# Altium PCB AIRZAI_NFC_READER_FLEX.PcbDoc (part 1 of 2)
Units mil, origin at the board's own origin, x right, y up, seen from the top; angles counter-clockwise.
Board outline 2897.24 x 5925.59 mil, 2 copper layers (Top Layer, Bottom Layer); 45 components, 43 nets, 193 pads, 92 vias.
Unrouted connection lines stored in the file: 129.
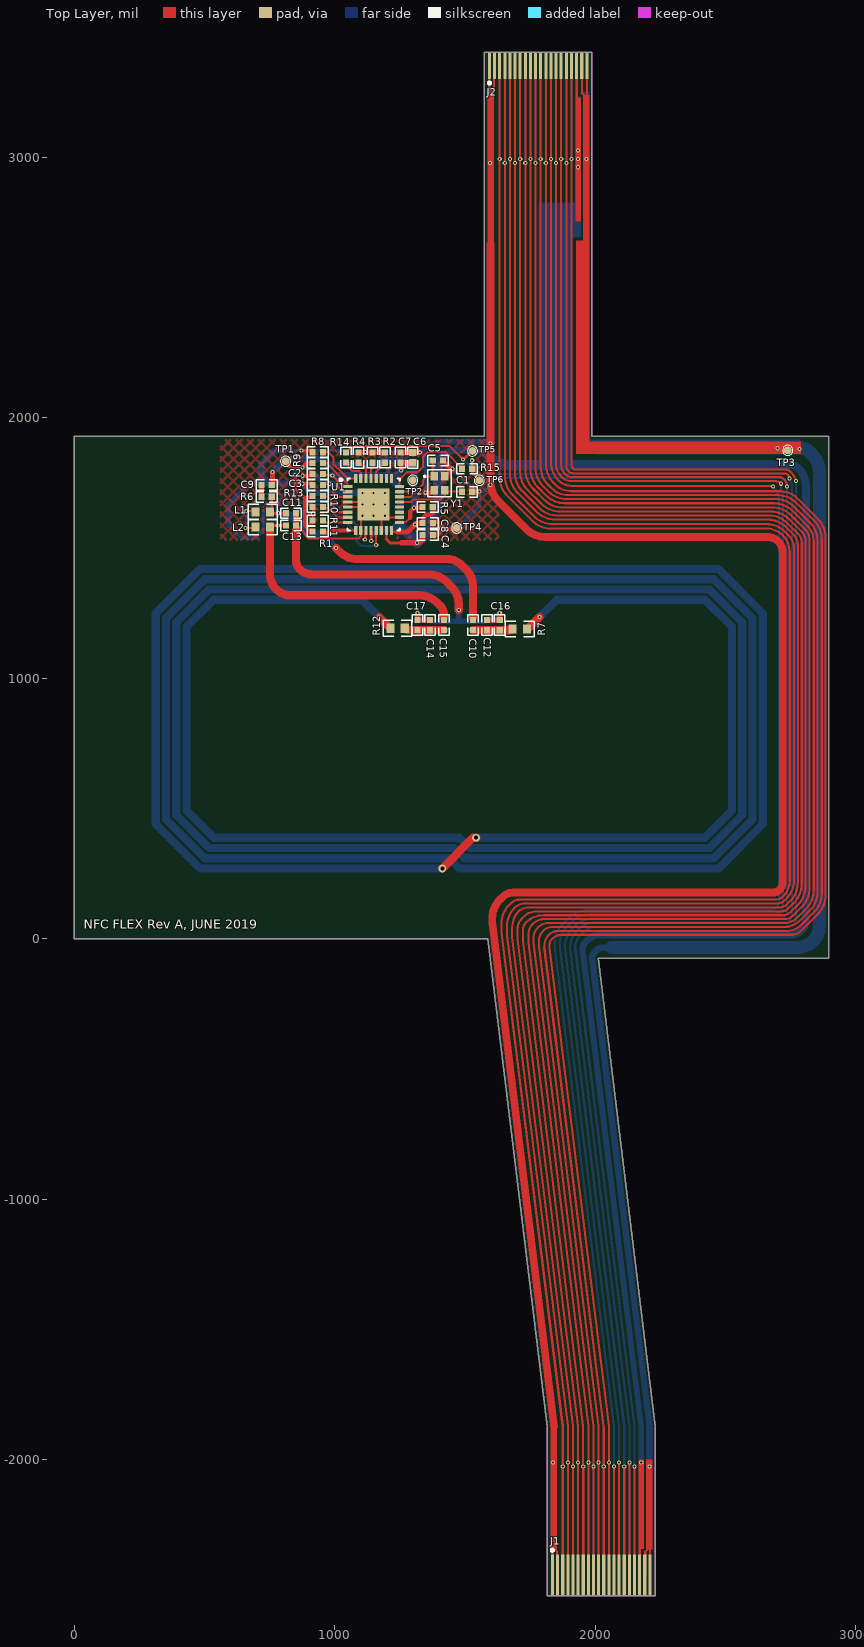
[diagram p0: Top Layer view]
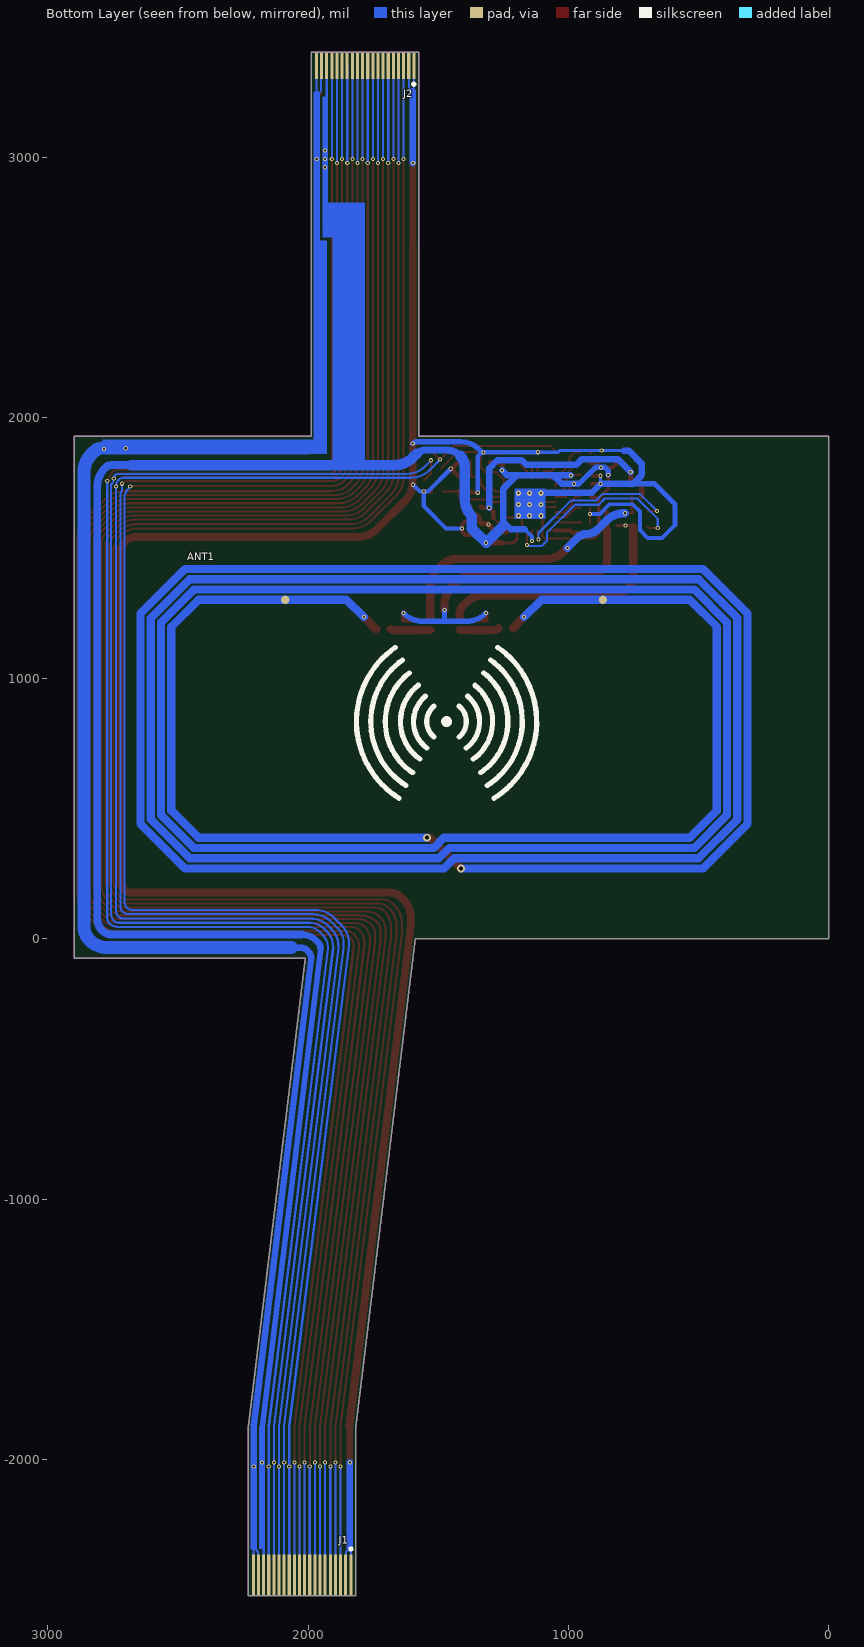
[diagram p1: Bottom Layer view, seen from below]
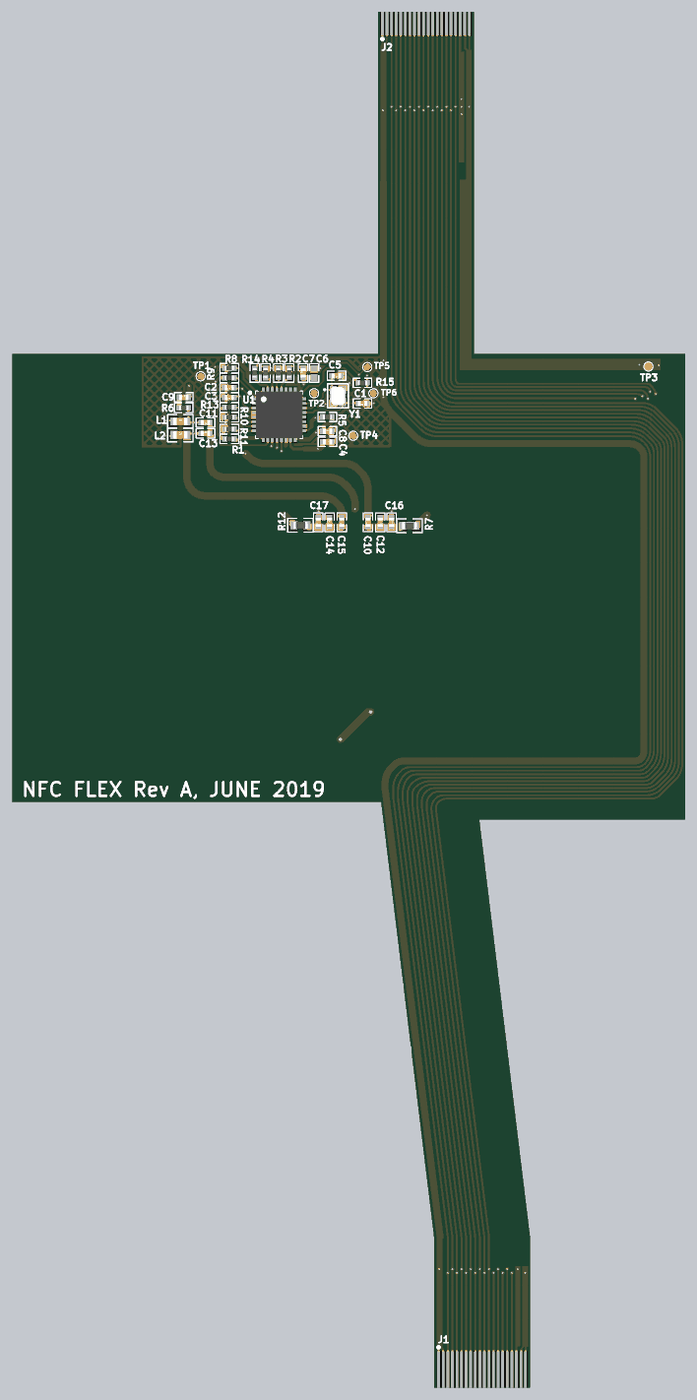
[diagram p3: 3D render of the assembled board from above, using the file's embedded part models]

## Layer stack, top to bottom
Top Solder: solder mask 0.4, Solder Resist, Dk 3.5
Top Layer: signal copper 1.4
Dielectric 1: dielectric 12.6, FR-4, Dk 4.8
Bottom Layer: signal copper 1.4
Bottom Solder: solder mask 0.4, Solder Resist, Dk 3.5

## Board outline
0.02,0 0.02,1929.12 1574.03,1929.12 1574.03,3402.74 1987.42,3402.74 1987.42,1929.12 2897.26,1929.12 2897.26,-75.35 2010.72,-75.35 2010.72,-75.36 2229.54,-1875.34 2229.54,-2522.85 1816.16,-2522.85 1816.16,-1875.34 1588.18,0 1588.16,0

## Design rules (kind name [scope] priority, off if disabled: settings)
Clearance Clearance_polygon_5V [OnLayer('Keep-Out Layer') vs (InNet('+5V') AND InPolygon)] p1: gap=10 ignorepadtopadclearanceinfootprint=FALSE
Clearance Clearance_POLYGON_KEEPOUT [(OnLayer('Keep-Out Layer')) vs (InNet('GND') AND InPolygon)] p2: gap=10 ignorepadtopadclearanceinfootprint=FALSE
Clearance [All] p3: gap=6 ignorepadtopadclearanceinfootprint=FALSE
MinimumSolderMaskSliver [All] p1: minsoldermaskwidth=1
PolygonConnect [All] p1: connectstyle=Direct reliefconductorwidth=10 reliefentries=4 polygonreliefangle="90 Angle" airgapwidth=10
RoomDefinition AIRZAI_NFC_READER_FLEX [InComponentClass('AIRZAI_NFC_READER_FLEX')] p1: confinementstyle=ConfineIn formatcopy=TRUE lockcomponents=FALSE outline -15221.72,-15299.04 15708.16,-15299.04 15708.16,7258.15 -15221.72,7258.15
RoutingVias [All] p1: holewidth=28 width=50 viastyle="Through Hole" minholewidth=8 minwidth=16 maxholewidth=28 maxwidth=50
SilkToSilkClearance [All] p1: silktosilkclearance=0
SilkToSolderMaskClearance [IsPad] p1: minsilkscreentomaskgap=2 clearancetoexposedcopper=TRUE
SolderMaskExpansion [All] p1: expansion=4
UnRoutedNet [All] p1: checkbadconnections=TRUE
Width [All] p1: maxlimit=100 minlimit=6 preferedwidth=10
26 further rules are at their usual default settings.

## Components (designator, comment, footprint, x,y, rotation, side; value= is the part's Value field where it differs from the comment)
ANT1 "NFC_ANT" ANTENNA-NFC-60MMX30MM 1477.74,844.1 r180 bottom locked
C1 "12pF" 0402CAP 1507.84,1715.47 r180 top
C2 "0.1µF" 0402CAP 934.39,1783.61 r180 top
C3 "0.1µF" 0402CAP 934.39,1740.92 r180 top
C4 "0.1µF" 0402CAP 1357.06,1550.04 r0 top
C5 "12pF" 0402CAP 1395.96,1835.21 r180 top
C6 "1uF" CAPC0402(1005)60_M 1299.26,1846.83 r270 top
C7 "0.1µF" 0402CAP 1252.04,1846.96 r90 top
C8 "0.1µF" 0402CAP 1357.06,1596.04 r0 top
C9 "1nF" 0402CAP 738.46,1742.21 r0 top
C10 "18pF" 0402CAP 1531.16,1204.13 r90 top
C11 "220pF" 0402CAP 831.89,1633.21 r180 top
C12 "47pF" 0402CAP 1584.06,1203.78 r270 top
C13 "220pF" 0402CAP 831.89,1586.21 r0 top
C14 "47pF" 0402CAP 1365.75,1203.78 r90 top
C15 "18pF" 0402CAP 1418.85,1203.97 r90 top
C16 "DNP" 0402CAP 1633.09,1203.78 r270 top
C17 "DNP" 0402CAP 1317.06,1203.97 r90 top
J1 "FFC Cable" FFC_PADS_MBD 2013.01,-2444.11 r180 top locked
J2 "FFC Cable" FFC_PADS_LID 1770.88,3351.56 r180 top locked
L1 "560nH" 0603CAP 723.46,1638.21 r0 top
L2 "560mH" 0603CAP 723.46,1580.21 r0 top
R1 "0R" 0402 934.42,1562.76 r180 top
R2 "10K" 0402 1192.04,1846.96 r270 top
R3 "10K" 0402 1145.04,1846.96 r270 top
R4 "10K" 0402 1090.42,1846.76 r270 top
R5 "1K" 0402 1356.58,1657.49 r180 top
R6 "2.7K" 0402 738.15,1696.21 r180 top
R7 "3.3" 0603 1710.06,1189.13 r180 top
R8 "10K" 0402 934.42,1867.54 r180 top
R9 "10K" 0402 934.42,1825.76 r180 top
R10 "0R" 0402 934.58,1656.76 r180 top
R11 "0R" 0402 934.42,1605.76 r180 top
R12 "3.3" 0603 1241.06,1191.35 r0 top
R13 "10K" 0402 934.42,1698.76 r180 top
R14 "0R" 0402 1043.42,1847.03 r90 top
R15 "0R" 0402 1507.84,1804.08 r0 top
TP1 "WIREPT" TP_0.9MM 811.04,1832.65 r90 top
TP2 "WIREPT" TP_0.9MM 1299.42,1759.76 r270 top
TP3 "WIREPT" TP_0.9MM 2738.84,1874.65 r90 top
TP4 "WIREPT" TP_0.9MM 1467.84,1576.65 r90 top
TP5 "WIREPT" TP_0.9MM 1528.69,1872.34 r90 top
TP6 "WIREPT" TP_0.9MM 1554.84,1759.47 r90 top
U1 "MFRC52202HN1,115" VFQFN-32-MFRC52202HN1,157 1149.06,1666.76 r0 top
Y1 "27.12MHz" XTAL_2016 1402.06,1748.08 r270 top

## Footprints (in the part's own frame and the unit in brackets; to place one, negate y for a bottom-side part, rotate by r counter-clockwise, add the part's x,y. Pads: shape width x height; smd on the part's side, far side on the other; paste and mask are expansions set on the pad)
0402 [mm] "Chip Resistor, Body 1.1x0.5mm, IPC High Density"
  rect 0.6x0.6 smd: 1(-0.5,0) 2(0.5,0)
  silkscreen extent -1.02,-0.51 1.02,0.51, body extent -0.5,-0.25 0.5,0.25, height 0.27
0402CAP [mm] "Chip Capacitor, Body 1.1x0.5mm, IPC High Density"
  rect 0.6x0.6 smd: 1(-0.5,0) 2(0.5,0)
  silkscreen extent -1.02,-0.51 1.02,0.51, body extent -0.5,-0.3 0.5,0.3, height 0.19
0603 [mm] "Chip Resistor, Body 1.6x0.8mm, IPC High Density"
  rect 0.8x0.9 smd: 1(-0.7,0) 2(0.7,0)
  silkscreen extent -1.4,-0.76 1.4,0.76, body extent -0.8,-0.41 0.8,0.4, height 0.37
0603CAP [mm] "Chip Capacitor, Body 1.6x0.8mm, IPC High Density"
  rect 0.8x0.9 smd: 1(-0.7,0) 2(0.7,0)
  silkscreen extent -1.4,-0.76 1.4,0.76, body extent -0.8,-0.4 0.8,0.4, height 0.29
ANTENNA-NFC-60MMX30MM [mm] "ANTENNA-ID2+10P-01"
  round 0.8 smd paste-0.8: 1(-15.494,11.6) 2(15.494,11.6)
  Top Layer lines w0.8: 15.494,11.6 23.97,11.6 26.6,8.97 26.6,-8.97 23.97,-11.6 0,-11.6 -1,-12.6 -24.404,-12.6 -27.6,-9.404 -27.6,9.404 -24.404,12.6 24.404,12.6 27.6,9.404 27.6,-9.404 24.404,-12.6 0.508,-12.6 -0.492,-13.6 -24.838,-13.6 -28.6,-9.838 -28.6,9.838 -24.838,13.6 24.838,13.6 28.6,9.838 28.6,-9.838 24.838,-13.6 1,-13.6 0,-14.6 -25.272,-14.6 -29.6,-10.272 -29.6,10.272 -25.272,14.6 25.272,14.6 29.6,10.272 29.6,-10.272 25.272,-14.6 1.651,-14.6 ; -1.651,-11.6 -23.97,-11.6 -26.6,-8.97 -26.6,8.97 -23.97,11.6 -15.494,11.6
  Bottom Layer lines w0.8: 1.651,-14.6 -1.349,-11.6 -1.651,-11.6
CAPC0402(1005)60_M [mm] "Chip Capacitor, Body 1.0x0.5mm, Height 0.6mm, IPC Low Density"
  rect 0.72x0.72 smd: 1(-0.5,0) 2(0.5,0)
  silkscreen extent -1.02,-0.51 1.02,0.51, body extent -0.55,-0.3 0.55,0.3, height 0.6
FFC_PADS_LID [mm] "(0.50mm"
  rect 0.3x2.6 smd: 1(4.5,0) 2(4,0) 3(3.5,0) 4(3,0) 5(2.5,0) 6(2,0) 7(1.5,0) 8(1,0) 9(0.5,0) 10(0,0) 11(-0.5,0) 12(-1,0) 13(-1.5,0) 14(-2,0) 15(-2.5,0) 16(-3,0) 17(-3.5,0) 18(-4,0) 19(-4.5,0) 20(-5,0)
  rect 0.3x2.6 smd far side: 1(4.5,0) 2(4,0) 3(3.5,0) 4(3,0) 5(2.5,0) 6(2,0) 7(1.5,0) 8(1,0) 9(0.5,0) 10(0,0) 11(-0.5,0) 12(-1,0) 13(-1.5,0) 14(-2,0) 15(-2.5,0) 16(-3,0) 17(-3.5,0) 18(-4,0) 19(-4.5,0) 20(-5,0)
  silkscreen extent 4.37,1.58 4.62,1.83
FFC_PADS_MBD [mm] "(0.50mm"
  rect 0.3x4 smd: 1(4.5,0) 2(4,0) 3(3.5,0) 4(3,0) 5(2.5,0) 6(2,0) 7(1.5,0) 8(1,0) 9(0.5,0) 10(0,0) 11(-0.5,0) 12(-1,0) 13(-1.5,0) 14(-2,0) 15(-2.5,0) 16(-3,0) 17(-3.5,0) 18(-4,0) 19(-4.5,0) 20(-5,0)
  rect 0.3x4 smd far side: 1(4.5,0) 2(4,0) 3(3.5,0) 4(3,0) 5(2.5,0) 6(2,0) 7(1.5,0) 8(1,0) 9(0.5,0) 10(0,0) 11(-0.5,0) 12(-1,0) 13(-1.5,0) 14(-2,0) 15(-2.5,0) 16(-3,0) 17(-3.5,0) 18(-4,0) 19(-4.5,0) 20(-5,0)
  silkscreen extent 4.39,-2.56 4.64,-2.31
TP_0.9MM [mm] "0.9MM DIA TESTPOINT"
  round 0.75 smd paste-5 mask+0.05: 1(0,0)
  silkscreen extent -0.5,-0.5 0.5,0.5
VFQFN-32-MFRC52202HN1,157 [mm]
  rect 0.9x0.31 smd: 1(-2.529,1.75) 2(-2.529,1.25) 3(-2.529,0.75) 4(-2.529,0.25) 5(-2.529,-0.25) 6(-2.529,-0.75) 7(-2.529,-1.25) 8(-2.529,-1.75) 17(2.529,-1.75) 18(2.529,-1.25) 19(2.529,-0.75) 20(2.529,-0.25) 21(2.529,0.25) 22(2.529,0.75) 23(2.529,1.25) 24(2.529,1.75)
  rect 0.31x0.9 smd: 9(-1.75,-2.529) 10(-1.25,-2.529) 11(-0.75,-2.529) 12(-0.25,-2.529) 13(0.25,-2.529) 14(0.75,-2.529) 15(1.25,-2.529) 16(1.75,-2.529) 25(1.75,2.529) 26(1.25,2.529) 27(0.75,2.529) 28(0.25,2.529) 29(-0.25,2.529) 30(-0.75,2.529) 31(-1.25,2.529) 32(-1.75,2.529)
  rect 3.1x3.1 smd: 33(0,0)
  silkscreen extent -3.32,-2.55 2.55,2.55, body extent -2.55,-2.55 2.55,2.55, height 1
XTAL_2016 [mm] "2.00mm x 1.60mm"
  rect 0.85x0.75 smd: 1(-0.675,-0.525) 2(0.675,-0.525) 3(0.675,0.525) 4(-0.675,0.525)
  silkscreen extent -1.32,-1.47 1.32,1.14, body extent -1,-0.81 1,0.79, height 0.65

## Part data
C1 C5: library part CAP, "CAP CER 12PF 50V C0G/NP0 0402", Case/Package=0402, Case Code (Metric)=1005, Dielectric=C0G, Dielectric Material=Ceramic, Manufacturer=KEMET, Manufacturer Part Number=C0402C120J5GACTU, Max Operating Temperature=125°C, Min Operating Temperature=-55°C, Package Quantity=1, Supplier Part Number 1=399-1013-6-ND, Temperature Coefficient=30ppm/°C, Tolerance=5%, Voltage=50V, Capacitance=12pF, Case Code (Imperial)=0402, ComponentLink1Description=https://www.yuden.co.jp/productdata/catalog/mlcc01_e.pdf?src-supplier=Digi-Key, ComponentLink1URL=https://www.yuden.co.jp/productdata/catalog/mlcc01_e.pdf?src-supplier=Digi-Key, ComponentLink2Description=http://www.onlinecomponents.com/productFiles/mf-TAI/964emk105bj105kv-f.pdf?src-supplier=Onlinecomponents.com, ComponentLink2URL=http://www.onlinecomponents.com/productFiles/mf-TAI/964emk105bj105kv-f.pdf?src-supplier=Onlinecomponents.com, ComponentLink3Description=http://www.farnell.com/datasheets/2091854.pdf?src-supplier=Element14, ComponentLink3URL=http://www.farnell.com/datasheets/2091854.pdf?src-supplier=Element14, ComponentLink4Description=https://www.verical.com/server-webapp/html/getDatasheet?partID=638287&src-supplier=Verical, ComponentLink4URL=https://www.verical.com/server-webapp/html/getDatasheet?partID=638287&src-supplier=Verical, ComponentLink5Description=http://ds.yuden.co.jp/TYCOMPAS/ut/detail.do?productNo=EMK105BJ105KV-F&fileName=EMK105BJ105KV-F_SS&mode=specSheetDownload&src-supplier=Mouser, ComponentLink5URL=http://ds.yuden.co.jp/TYCOMPAS/ut/detail.do?productNo=EMK105BJ105KV-F&fileName=EMK105BJ105KV-F_SS&mode=specSheetDownload&src-supplier=Mouser, ComponentLink6Description=http://www.farnell.com/datasheets/1497285.pdf?src-supplier=Element14, ComponentLink6URL=http://www.farnell.com/datasheets/1497285.pdf?src-supplier=Element14, ComponentLink7Description=http://www.farnell.com/datasheets/2119935.pdf?src-supplier=Element14, ComponentLink7URL=http://www.farnell.com/datasheets/2119935.pdf?src-supplier=Element14, ComponentLink8Description=http://www.farnell.com/datasheets/2740746.pdf?src-supplier=Newark, ComponentLink8URL=http://www.farnell.com/datasheets/2740746.pdf?src-supplier=Newark, ComponentLink9Description=http://www.mouser.com/ds/2/212/KEM_C1003_C0G_SMD-1101588.pdf?src-supplier=Mouser, ComponentLink9URL=http://www.mouser.com/ds/2/212/KEM_C1003_C0G_SMD-1101588.pdf?src-supplier=Mouser, ComponentLink10Description=https://www.alliedelec.com/m/d/9bfe7773041ffe9d406e68bc7b377fdd.pdf?src-supplier=Allied+Electronics, ComponentLink10URL=https://www.alliedelec.com/m/d/9bfe7773041ffe9d406e68bc7b377fdd.pdf?src-supplier=Allied+Electronics, Depth=0.5mm, Height=0.5mm, Lead Free="Lead Free", Lead Pitch=0.3mm, Length=1mm, Mount="Surface Mount,PCB", Number of Pins=2, Packaging="Tape and Reel", Pricing 1="1=0.1, 10=0.055, 100=0.0243, 500=0.01738, 1000=0.01366, 2500=0.01242, 5000=0.01143 (USD)", Radiation Hardening=No, REACH SVHC="No SVHC", Stock 1=1653435, Supplier 1=Digi-Key, Termination=SMD/SMT, Thickness=0.022inch, Voltage Rating=50V, Voltage Rating (DC)=50V, Width=0.02inch
C2 C3 C4 C7 C8: library part C0402-100n, "Capacitor, X7R, ±10%", Case-EIA=0402, Case-Metric=1005, Manufacturer=TDK, Manufacturer Part Number=C1005X7R1C104K, Rated Voltage="16 V", Supplier Part Number 1=445-4952-2-ND, Tolerance=±20%, Max Thickness="0.6 mm", Note="16V ±10% X7R", Pin Count=2, Supplier 1=Digi-Key, Technology=SMT
C6: library part CAP, "CAP 1uF 16V ±10% 0402 (1005 Metric) Thickness 0.6mm SMD", Case/Package=0402, Case Code (Metric)=1005, Dielectric=X5R, Manufacturer="Taiyo Yuden", Manufacturer Part Number=EMK105BJ105KV-F, Max Operating Temperature=85°C, Min Operating Temperature=-55°C, Package Quantity=1, Supplier Part Number 1=587-2477-6-ND, Tolerance=10%, Voltage Rating=16V, Capacitance=1uF, Case Code (Imperial)=0402, ComponentLink1Description=https://www.yuden.co.jp/productdata/catalog/mlcc01_e.pdf?src-supplier=Digi-Key, ComponentLink1URL=https://www.yuden.co.jp/productdata/catalog/mlcc01_e.pdf?src-supplier=Digi-Key, ComponentLink2Description=http://www.onlinecomponents.com/productFiles/mf-TAI/964emk105bj105kv-f.pdf?src-supplier=Onlinecomponents.com, ComponentLink2URL=http://www.onlinecomponents.com/productFiles/mf-TAI/964emk105bj105kv-f.pdf?src-supplier=Onlinecomponents.com, ComponentLink3Description=http://www.farnell.com/datasheets/2091854.pdf?src-supplier=Element14, ComponentLink3URL=http://www.farnell.com/datasheets/2091854.pdf?src-supplier=Element14, ComponentLink4Description=https://www.verical.com/server-webapp/html/getDatasheet?partID=638287&src-supplier=Verical, ComponentLink4URL=https://www.verical.com/server-webapp/html/getDatasheet?partID=638287&src-supplier=Verical, ComponentLink5Description=http://ds.yuden.co.jp/TYCOMPAS/ut/detail.do?productNo=EMK105BJ105KV-F&fileName=EMK105BJ105KV-F_SS&mode=specSheetDownload&src-supplier=Mouser, ComponentLink5URL=http://ds.yuden.co.jp/TYCOMPAS/ut/detail.do?productNo=EMK105BJ105KV-F&fileName=EMK105BJ105KV-F_SS&mode=specSheetDownload&src-supplier=Mouser, ComponentLink6Description=http://www.farnell.com/datasheets/1497285.pdf?src-supplier=Element14, ComponentLink6URL=http://www.farnell.com/datasheets/1497285.pdf?src-supplier=Element14, Depth=0.5mm, Halogen Free="Halogen Free", Height=0.5mm, Length=1mm, Mount="Surface Mount", Number of Pins=2, Packaging="Tape and Reel", Pricing 1="1=0.1, 10=0.076, 100=0.0337, 500=0.02406, 1000=0.01891, 2500=0.01719, 5000=0.01581 (USD)", Radiation Hardening=No, REACH SVHC=Unknown, Stock 1=1414379, Supplier 1=Digi-Key, Termination=SMD/SMT, Thickness=0.022inch, Voltage Rating (DC)=16V, Width=0.02inch
C9: library part 56p, "CAP CER 1000PF 50V C0G/NP0 0402", Case/Package=0402, Case Code (Metric)=1005, Dielectric=C0G, Manufacturer=Murata, Manufacturer Part Number=GRM1555C1H102FA01D, Max Operating Temperature=125°C, Min Operating Temperature=-55°C, Package Quantity=1, Supplier Part Number 1=490-6189-1-ND, Tolerance=1%, Voltage=50V, Capacitance=1nF, Case Code (Imperial)=0402, ComponentLink1Description=https://datasheet.ciiva.com/11621/c02e-11621677.pdf?src-supplier=Avnet, ComponentLink1URL=https://datasheet.ciiva.com/11621/c02e-11621677.pdf?src-supplier=Avnet, ComponentLink2Description=https://datasheet.ciiva.com/6270/partnumbering-e-01-6270478.pdf?src-supplier=Digi-Key, ComponentLink2URL=https://datasheet.ciiva.com/6270/partnumbering-e-01-6270478.pdf?src-supplier=Digi-Key, ComponentLink3Description=https://datasheet.ciiva.com/6270/partnumbering-e-01-6270477.pdf?src-supplier=Digi-Key, ComponentLink3URL=https://datasheet.ciiva.com/6270/partnumbering-e-01-6270477.pdf?src-supplier=Digi-Key, Depth=0.5mm, Height=0.5mm, Lead Free="Lead Free", Length=1mm, Material=Ceramic, Mount="Surface Mount", Packaging="Tape and Reel", Pricing 1="1 = 0.23000, 10 = 0.15400, 100 = 0.07780, 500 = 0.05322, 1000 = 0.04708, 2500 = 0.04504, 5000 = 0.04094 (USD)", Radiation Hardening=No, REACH SVHC="No SVHC", RoHS=Yes, Stock 1=2792285, Supplier 1=Digi-Key, Termination=SMD/SMT, Thickness=0.022inch, Voltage Rating=50V, Voltage Rating (DC)=50V, Width=0.02inch
C10 C15: library part 56p, "CAP CER 18PF 50V NP0 0402", Case/Package=0402, Case Code (Metric)=1005, Dielectric=C0G, Manufacturer="Kyocera AVX", Manufacturer Part Number=04025U180FAT2A, Max Operating Temperature=125°C, Min Operating Temperature=-55°C, Package Quantity=10000, Supplier Part Number 1=478-10144-1-ND, Tolerance=1%, Voltage Rating=50V, Capacitance=18pF, Case Code (Imperial)=0402, ComponentLink1Description=https://datasheet.ciiva.com/6257/kem-c1030-cbr-smd-6257578.pdf?src-supplier=Digi-Key, ComponentLink1URL=https://datasheet.ciiva.com/6257/kem-c1030-cbr-smd-6257578.pdf?src-supplier=Digi-Key, ComponentLink2Description=https://datasheet.ciiva.com/6257/kem-c1030-cbr-smd-6257580.pdf?src-supplier=Digi-Key, ComponentLink2URL=https://datasheet.ciiva.com/6257/kem-c1030-cbr-smd-6257580.pdf?src-supplier=Digi-Key, ComponentLink3Description=https://datasheet.ciiva.com/6257/kem-c1030-cbr-smd-6257582.pdf?src-supplier=Digi-Key, ComponentLink3URL=https://datasheet.ciiva.com/6257/kem-c1030-cbr-smd-6257582.pdf?src-supplier=Digi-Key, ComponentLink4Description=https://datasheet.ciiva.com/6269/useries-6269560.pdf?src-supplier=Digi-Key, ComponentLink4URL=https://datasheet.ciiva.com/6269/useries-6269560.pdf?src-supplier=Digi-Key, ComponentLink5Description=https://datasheet.ciiva.com/16327/useries-16327647.pdf?src-supplier=Future+Electronics, ComponentLink5URL=https://datasheet.ciiva.com/16327/useries-16327647.pdf?src-supplier=Future+Electronics, Composition=Ceramic, Contact Plating=Tin, Depth=0.5mm, Lead Free="Lead Free", Length=1mm, Mount="Surface Mount", Packaging="Tape and Reel", Pricing 1="1 = 0.38000, 10 = 0.26300, 100 = 0.15780, 500 = 0.11832, 1000 = 0.09991, 2500 = 0.09465, 5000 = 0.08939 (USD)", Radiation Hardening=No, RoHS=Yes, Stock 1=9413, Supplier 1=Digi-Key, Termination=SMD/SMT, Thickness=0.022inch, Voltage Rating (DC)=50V, Width=0.02inch
C11 C13: library part 56p, "CAP CER 220PF 50V NPO 0402", Case/Package=0402, Case Code (Metric)=1005, Dielectric=C0G, Manufacturer=Yageo, Manufacturer Part Number=CC0402FRNPO9BN221, Max Operating Temperature=125°C, Min Operating Temperature=-55°C, Supplier Part Number 1=311-3730-1-ND, Tolerance=1%, Voltage Rating=50V, Capacitance=220pF, Case Code (Imperial)=0402, ComponentLink1Description=https://datasheet.ciiva.com/15189/getdatasheetpartid-317481-15189141.pdf?src-supplier=Verical, ComponentLink1URL=https://datasheet.ciiva.com/15189/getdatasheetpartid-317481-15189141.pdf?src-supplier=Verical, ComponentLink2Description=https://datasheet.ciiva.com/11587/upy-gp-np0-16v-to-50v-8-11587311.pdf?src-supplier=Avnet, ComponentLink2URL=https://datasheet.ciiva.com/11587/upy-gp-np0-16v-to-50v-8-11587311.pdf?src-supplier=Avnet, ComponentLink3Description=https://datasheet.ciiva.com/13264/upy-gp-np0-16v-to-50v-8-3714-13264357.pdf?src-supplier=Mouser, ComponentLink3URL=https://datasheet.ciiva.com/13264/upy-gp-np0-16v-to-50v-8-3714-13264357.pdf?src-supplier=Mouser, ComponentLink4Description=https://datasheet.ciiva.com/16623/upy-gp-np0-16v-to-50v-8-16623951.pdf?src-supplier=Avnet+Europe, ComponentLink4URL=https://datasheet.ciiva.com/16623/upy-gp-np0-16v-to-50v-8-16623951.pdf?src-supplier=Avnet+Europe, ComponentLink5Description=https://datasheet.ciiva.com/17434/upy-gp-np0-16v-to-50v-8-17434283.pdf?src-supplier=Avnet+Europe, ComponentLink5URL=https://datasheet.ciiva.com/17434/upy-gp-np0-16v-to-50v-8-17434283.pdf?src-supplier=Avnet+Europe, ComponentLink6Description=https://datasheet.ciiva.com/26918/getdatasheetpartid-403443-26918299.pdf?src-supplier=Verical, ComponentLink6URL=https://datasheet.ciiva.com/26918/getdatasheetpartid-403443-26918299.pdf?src-supplier=Verical, Composition=Ceramic, Depth=0.5mm, Height=0.5mm, Lead Free="Lead Free", Length=1mm, Mount="Surface Mount", Packaging="Tape and Reel", Pricing 1="1 = 0.17000, 10 = 0.11700, 100 = 0.05520, 500 = 0.03872, 1000 = 0.03205, 2500 = 0.02983, 5000 = 0.02729 (USD)", Radiation Hardening=No, RoHS=Yes, Stock 1=23487, Supplier 1=Digi-Key, Termination=SMD/SMT, Thickness=0.022inch, Voltage Rating (DC)=50V, Weight=2.3E-05oz, Width=0.5mm
C12 C14: library part 56p, "CAP CER 47PF 50V C0G/NP0 0402", Dielectric=C0G, Manufacturer=Murata, Manufacturer Part Number=GJM1555C1H470FB01D, Supplier Part Number 1=490-16376-1-ND, Tolerance=1%, Voltage Rating (DC)=50V, Capacitance=47pF, ComponentLink1Description=http://search.murata.co.jp/Ceramy/image/img/A01X/G101/ENG/GJM1555C1H470FB01-01.pdf?src-supplier=Digi-Key, ComponentLink1URL=http://search.murata.co.jp/Ceramy/image/img/A01X/G101/ENG/GJM1555C1H470FB01-01.pdf?src-supplier=Digi-Key, Length=1mm, Pricing 1="1 = 0.28000, 10 = 0.19300, 100 = 0.09760, 500 = 0.06678, 1000 = 0.05908, 2500 = 0.05651, 5000 = 0.05137 (USD)", RoHS=No, Stock 1=48815, Supplier 1=Digi-Key, Thickness=500um, Width=500um
C16 C17: library part 56p, ComponentLink1Description=http://search.murata.co.jp/Ceramy/image/img/A01X/G101/ENG/GJM1555C1H470FB01-01.pdf?src-supplier=Digi-Key, ComponentLink1URL=http://search.murata.co.jp/Ceramy/image/img/A01X/G101/ENG/GJM1555C1H470FB01-01.pdf?src-supplier=Digi-Key
J1 J2: library part XF2M-2015-1A-R100, "Cable", ComponentLink1Description="Manufacturer URL", ComponentLink1URL=http://www.molex.com/molex/index.jsp, ComponentLink2URL=http://www.molex.com/webdocs/datasheets/pdf/en-us/0528922033_FFC_FPC_CONNECTORS.pdf, ComponentLink3Description="Package Specification", ComponentLink3URL=http://www.molex.com/pdm_docs/sd/528922033_sd.pdf
L1: library part Inductor, "FIXED IND 560NH 100MA 1.05 OHM", Case/Package=0603, Case Code (Metric)=1608, Current Rating=100mA, DC Resistance (DCR)=1.05R, Manufacturer=TDK, Manufacturer Part Number=MLF1608DR56JTD25, Max DC Current=30mA, Max Operating Temperature=125°C, Min Operating Temperature=-55°C, Package Quantity=4000, Ratings=AEC-Q200, Self Resonant Frequency=170MHz, Supplier Part Number 1=445-16970-1-ND, Test Frequency=25MHz, Tolerance=5%, Case Code (Imperial)=0603, ComponentLink1Description=https://datasheet.ciiva.com/41835/inductor-automotive-standard-mlf-en-41835679.pdf?src-supplier=Digi-Key, ComponentLink1URL=https://datasheet.ciiva.com/41835/inductor-automotive-standard-mlf-en-41835679.pdf?src-supplier=Digi-Key, Core Material=Ferrite, Height=0.8mm, Height - Seated (Max)=0.037inch, Inductance=560nH, Length=0.063inch, Mount="Surface Mount", Packaging="Tape and Reel", Pricing 1="1 = 0.33000, 10 = 0.29000, 100 = 0.19920, 500 = 0.17026, 1000 = 0.13041 (USD)", Q Factor=35, RoHS=Yes, Shielding=Shielded, Stock 1=60308, Supplier 1=Digi-Key, Termination=SMD/SMT, Weight=0.000141oz, Width=0.8mm
L2: library part Inductor, "FIXED IND 560NH 100MA 1.05 OHM", Case/Package=0603, Case Code (Metric)=1608, Current Rating=100mA, DC Resistance (DCR)=1.05R, Inductance=560nH, Manufacturer=TDK, Manufacturer Part Number=MLF1608DR56JTD25, Max DC Current=30mA, Max Operating Temperature=125°C, Min Operating Temperature=-55°C, Package Quantity=4000, Ratings=AEC-Q200, Self Resonant Frequency=170MHz, Supplier Part Number 1=445-16970-1-ND, Test Frequency=25MHz, Tolerance=5%, Case Code (Imperial)=0603, ComponentLink1Description=https://datasheet.ciiva.com/41835/inductor-automotive-standard-mlf-en-41835679.pdf?src-supplier=Digi-Key, ComponentLink1URL=https://datasheet.ciiva.com/41835/inductor-automotive-standard-mlf-en-41835679.pdf?src-supplier=Digi-Key, Core Material=Ferrite, Height=0.8mm, Height - Seated (Max)=0.037inch, Length=0.063inch, Mount="Surface Mount", Packaging="Tape and Reel", Pricing 1="1 = 0.33000, 10 = 0.29000, 100 = 0.19920, 500 = 0.17026, 1000 = 0.13041 (USD)", Q Factor=35, RoHS=Yes, Shielding=Shielded, Stock 1=60308, Supplier 1=Digi-Key, Termination=SMD/SMT, Weight=0.000141oz, Width=0.8mm
R1 R10 R11 R14 R15: library part R0402-12k, "Resistor, ±1%, 0.063W", Case-EIA=0402, Case-Metric=1005, Manufacturer=Panasonic, Manufacturer Part Number=ERJ-2GE0R00X, Supplier Part Number 1=P0.0JTR-ND, Tolerance=±5%, Max Thickness=0.6mm, Note="0.1W JUMPER", Pin Count=2, Supplier 1=Digi-Key, Technology=SMT
R2 R3 R4 R8 R9 R13: library part R0402-12k, "Resistor 10K, ±1%, 0.063W", Case/Package=0402, Case Code (Metric)=1005, Manufacturer="Vishay Dale", Manufacturer Part Number=CRCW040210K0JNED, Max Operating Temperature=155°C, Max Power Dissipation=63mW, Min Operating Temperature=-55°C, Package Quantity=1, Resistance=10kR, Supplier Part Number 1=541-10KJDKR-ND, Temperature Coefficient=200ppm/°C, Tolerance=5%, Voltage Rating=50V, Case Code (Imperial)=0402, ComponentLink1Description=http://www.vishay.com/docs/20035/dcrcwe3.pdf?src-supplier=Digi-Key, ComponentLink1URL=http://www.vishay.com/docs/20035/dcrcwe3.pdf?src-supplier=Digi-Key, ComponentLink2Description=http://www.farnell.com/datasheets/2045673.pdf?src-supplier=Element14, ComponentLink2URL=http://www.farnell.com/datasheets/2045673.pdf?src-supplier=Element14, ComponentLink3Description=https://www.alliedelec.com/m/d/0c934d6939ccefa68dbe0b96d821c8cf.pdf?src-supplier=Allied+Electronics, ComponentLink3URL=https://www.alliedelec.com/m/d/0c934d6939ccefa68dbe0b96d821c8cf.pdf?src-supplier=Allied+Electronics, ComponentLink4Description=http://www.vishay.com/docs/20035/dcrcwe3.pdf?src-supplier=Avnet, ComponentLink4URL=http://www.vishay.com/docs/20035/dcrcwe3.pdf?src-supplier=Avnet, Composition="Thick Film", Contact Plating=Tin, Depth=0.5mm, Features="Automotive AEC-Q200", Height=0.016inch, Length=1mm, Military Standard=Not, Mount="Surface Mount", Number of Terminations=2, Packaging="Tape and Reel", Power Rating=63mW, Pricing 1="1=0.1, 10=0.034, 100=0.0138, 1000=0.00618, 2500=0.00536, 5000=0.00443 (USD)", Radiation Hardening=No, REACH SVHC=Unknown, Stock 1=2, Supplier 1=Digi-Key, Termination=SMD/SMT, Weight=2.3E-05oz, Width=0.5mm
R5: library part R0402-12k, "RES SMD 1K OHM 1% 1/16W 0402", Case/Package=0402, Case Code (Metric)=1005, Manufacturer=Yageo, Manufacturer Part Number=RC0402FR-071KL, Max Operating Temperature=155°C, Min Operating Temperature=-55°C, Power Rating=62.5mW, Resistance=1kR, Supplier Part Number 1=311-1.00KLRCT-ND, Temperature Coefficient=100ppm/°C, Tolerance=1%, Voltage Rating=50V, Case Code (Imperial)=0402, ComponentLink1Description=https://datasheet.ciiva.com/11819/0900766b80c66297-11819477.pdf?src-supplier=RSComponents, ComponentLink1URL=https://datasheet.ciiva.com/11819/0900766b80c66297-11819477.pdf?src-supplier=RSComponents, ComponentLink2Description=https://datasheet.ciiva.com/12666/pyu-rc0402-51-rohs-l-6-r-12666741.pdf?src-supplier=Mouser, ComponentLink2URL=https://datasheet.ciiva.com/12666/pyu-rc0402-51-rohs-l-6-r-12666741.pdf?src-supplier=Mouser, ComponentLink3Description=https://datasheet.ciiva.com/17063/pyu-rc0402-51-rohs-l-6-r-17063193.pdf?src-supplier=Future+Electronics, ComponentLink3URL=https://datasheet.ciiva.com/17063/pyu-rc0402-51-rohs-l-6-r-17063193.pdf?src-supplier=Future+Electronics, ComponentLink4Description=https://datasheet.ciiva.com/22747/1018594-22747513.pdf?src-supplier=Element14, ComponentLink4URL=https://datasheet.ciiva.com/22747/1018594-22747513.pdf?src-supplier=Element14, ComponentLink5Description=https://datasheet.ciiva.com/7849/1018594-7849869.pdf?src-supplier=Element14, ComponentLink5URL=https://datasheet.ciiva.com/7849/1018594-7849869.pdf?src-supplier=Element14, ComponentLink6Description=https://datasheet.ciiva.com/7983/1018594-7983502.pdf?src-supplier=Element14, ComponentLink6URL=https://datasheet.ciiva.com/7983/1018594-7983502.pdf?src-supplier=Element14, ComponentLink7Description=https://datasheet.ciiva.com/7849/1018594-7849871.pdf?src-supplier=Element14, ComponentLink7URL=https://datasheet.ciiva.com/7849/1018594-7849871.pdf?src-supplier=Element14, Composition="Thick Film", Depth=0.5mm, Height=0.32mm, Lead Free="Lead Free", Length=1mm, Military Standard=Not, Number of Pins=2, Packaging="Tape and Reel", Pricing 1="1 = 0.10000, 10 = 0.01600, 100 = 0.00670, 1000 = 0.00301, 2500 = 0.00261, 5000 = 0.00215 (USD)", REACH SVHC=Unknown, RoHS=Yes, Stock 1=71399230, Supplier 1=Digi-Key, Termination=SMD/SMT, Voltage Rating (DC)=50V, Width=0.5mm
R6: library part R0402-12k, "RES SMD 2.7K OHM 1% 1/16W 0402", Case/Package=0402, Manufacturer="Yageo Phycomp", Manufacturer Part Number=RC0402FR-072K7L, Max Operating Temperature=155°C, Min Operating Temperature=-55°C, Power Rating=63mW, Resistance=2.7kR, Supplier Part Number 1=311-2.70KLRCT-ND, Temperature Coefficient=100ppm/°C, Tolerance=1%, Voltage Rating (DC)=50V, ComponentLink1Description=http://www.farnell.com/datasheets/2167052.pdf?src-supplier=Farnell, ComponentLink1URL=http://www.farnell.com/datasheets/2167052.pdf?src-supplier=Farnell, ComponentLink2Description=http://www.yageo.com/documents/recent/PYu-RC_Group_51_RoHS_L_10.pdf?src-supplier=Digi-Key, ComponentLink2URL=http://www.yageo.com/documents/recent/PYu-RC_Group_51_RoHS_L_10.pdf?src-supplier=Digi-Key, ComponentLink3Description=http://www.yageo.com/documents/recent/PYu-RC_Group_51_RoHS_L_9.pdf?src-supplier=Digi-Key, ComponentLink3URL=http://www.yageo.com/documents/recent/PYu-RC_Group_51_RoHS_L_9.pdf?src-supplier=Digi-Key, ComponentLink4Description=http://www.farnell.com/datasheets/2167052.pdf?src-supplier=Newark, ComponentLink4URL=http://www.farnell.com/datasheets/2167052.pdf?src-supplier=Newark, ComponentLink5Description=http://documents.rs-components.com/techlib://itc_doclist_GB.htm?stockno=6186554&src-supplier=RSComponents, ComponentLink5URL=http://documents.rs-components.com/techlib://itc_doclist_GB.htm?stockno=6186554&src-supplier=RSComponents, Depth=0.5mm, Height=0.32mm, Lead Free="Lead Free", Length=1mm, Mount="Surface Mount", Number of Pins=2, Packaging="Cut Tape", Pricing 1="1 = 0.10000, 10 = 0.01600, 100 = 0.00670, 1000 = 0.00301, 2500 = 0.00261, 5000 = 0.00215 (USD)", REACH SVHC="No SVHC", RoHS=Yes, Stock 1=1726987, Supplier 1=Digi-Key, Width=500um
R7 R12: library part R0402-12k, "RES SMD 3.3 OHM 1% 1/10W 0603", Case/Package=0603, Manufacturer=Yageo, Manufacturer Part Number=AC0603FR-073R3L, Max Operating Temperature=155°C, Max Power Dissipation=100mW, Min Operating Temperature=-55°C, Resistance=3.3R, Supplier Part Number 1=YAG5335CT-ND, Temperature Coefficient=200ppm/°C, Tolerance=1%, ComponentLink1Description=http://www.yageo.com/NewPortal/yageodocoutput?fileName=/pdf/R-Chip/PYu-AC_51_RoHS_L_6.pdf&src-supplier=Digi-Key, ComponentLink1URL=http://www.yageo.com/NewPortal/yageodocoutput?fileName=/pdf/R-Chip/PYu-AC_51_RoHS_L_6.pdf&src-supplier=Digi-Key, ComponentLink2Description=http://www.yageo.com/NewPortal/yageodocoutput?fileName=/pdf/R-Chip/PYu-AC_51_RoHS_L_5.pdf&src-supplier=Digi-Key, ComponentLink2URL=http://www.yageo.com/NewPortal/yageodocoutput?fileName=/pdf/R-Chip/PYu-AC_51_RoHS_L_5.pdf&src-supplier=Digi-Key, Composition="Thick Film", Features="Moisture Resistant", Height=0.022inch, Length=0.063inch, Number of Terminations=2, Packaging="Tape and Reel", Pricing 1="1 = 0.10000, 10 = 0.05800, 100 = 0.02350, 1000 = 0.01057, 2500 = 0.00918 (USD)", RoHS=Yes, Stock 1=21144, Supplier 1=Digi-Key, Width=0.031inch
U1: library part MFRC52201HN1,157, "IC RFID READER 13.56MHZ 32HVQFN", Frequency=13.56MHz, Manufacturer="NXP Semiconductors", Max Operating Temperature=85°C, Min Operating Temperature=-25°C, Package Quantity=1500, Supplier Part Number 1=568-15200-1-ND, ComponentLink1Description=Upverter, ComponentLink1URL=https://upverter.com/upn/revision/969ab42917e1bb0e/, ComponentLink2Description=Datasheet, ComponentLink2URL=https://media.digikey.com/pdf/Data%20Sheets/NXP%20PDFs/MFRC522.pdf, ComponentLink3Description=https://datasheet.ciiva.com/15040/mfrc522-15040655.pdf?src-supplier=Digi-Key, ComponentLink3URL=https://datasheet.ciiva.com/15040/mfrc522-15040655.pdf?src-supplier=Digi-Key, Manufacturer Part Number=MFRC52202HN1,115, Number of Pins=32, Packaging="Tape and Reel", Pricing 1="1 = 6.54000, 10 = 5.83700, 25 = 5.25280, 100 = 4.78590, 250 = 4.31904, 500 = 3.87544 (USD)", Radiation Hardening=No, RoHS=Yes, Stock 1=558, Supplier 1=Digi-Key
Y1: library part ZTB_2, "CRYSTAL 27.12MHZ 10PF SMD", Manufacturer="ECS International", Manufacturer Part Number=ECS-271.2-10-37-CKM-TR, Supplier Part Number 1=XC2511DKR-ND, ComponentLink1Description=http://www.murata.com/products/catalog/pdf/p79e.pdf, ComponentLink1URL=http://www.murata.com/products/catalog/pdf/p79e.pdf, Pricing 1="1=0.74, 10=0.613, 50=0.552, 100=0.4906, 500=0.46608 (USD)", Stock 1=1000, Supplier 1=Digi-Key

## Via types
v1: diameter 16, hole 8, Top Layer to Bottom Layer, tented both sides, 81 vias
v2: diameter 19.68, hole 8, Top Layer to Bottom Layer, 9 vias
v3: diameter 30, hole 15, Top Layer to Bottom Layer, tented both sides, 2 vias

## Nets (pads, with @x,y where several pads share a name; then routed paths per layer and width w, separated by ;. In a path a pad name is that pad's centre, name@x,y a point inside that pad or via, vN(x,y) a via of type N, cw(c..) or ccw(c..) an arc to the next point about the centre after c; other vN are vias at no path point)
3V3: C2.1 C3.1 C4.1 C6.2 C7.1 J1.18 J2.18 R1.2 R9.2 R13.2 TP1.1 U1.2 U1.3 U1.12 U1.15 | length 7099
  Top Layer w8: C3.1@954.08,1740.92 959.37,1746.21 v1(979.02,1746.21) 993.58,1731.65 993.58,1713.21 1010.5,1696.29 U1.3@1049.5,1696.29 ; C2.1@954.08,1783.61 957.89,1779.8 988.89,1779.8 1010.03,1758.65 1010.03,1737.16 1029.12,1718.08 1047.39,1718.08 U1.2@1049.5,1715.97 ; U1.12@1139.22,1567.19 1139.99,1566.42 v1(1139.99,1525.98) ; 1198.28,1535.52 U1.15@1198.28,1567.19
  Top Layer w10: 1928.26,3121.38 1928.36,3121.48 J2.18@1928.36,3351.56 ; 2170.39,-2331.53 2170.49,-2331.63 J1.18@2170.49,-2444.11
  Top Layer w12: 1198.28,1535.52 1198.28,1533.29 1212.04,1519.52 1257.04,1519.52
  Top Layer w13: v1(847.42,1779.99) 847.42,1726.9 884.24,1690.07 884.24,1684.98 ; R1.2@914.73,1562.76 905.86,1562.76 884.24,1584.38 884.24,1684.98 ; R13.2@914.89,1696.73 912.14,1693.98 893.24,1693.98 884.24,1684.98
  Top Layer w15: TP1.1@808.22,1829.83 809.65,1829.83 830.1,1809.39 v1(875.42,1809.39) 891.79,1825.76 R9.2@914.73,1825.76
  Top Layer w17: v1(1254.73,1797.76) C7.1@1254.73,1822.59
  Top Layer w20: C7.1@1254.73,1822.59 1251.04,1826.27 C7.1@1252.04,1827.27 1299.14,1827.27 C6.2@1299.26,1827.15 ; 1257.04,1519.52 1257.43,1519.91 v1(1316.19,1519.91) 1324.58,1519.91 1336.58,1531.91 1336.58,1549.24 C4.1@1337.38,1550.04
  Bottom Layer w10: 1928.26,3121.38 1928.36,3121.48 J2.18@1928.36,3351.56 ; 2170.39,-2331.53 2170.49,-2331.63 J1.18@2170.49,-2444.11
  Bottom Layer w15: v1(1139.99,1525.98) 1139.99,1543.73 1167.78,1571.52
  Bottom Layer w20: v1(847.42,1779.99) 847.42,1796.76 860.04,1809.39 v1(875.42,1809.39) 896.79,1809.39 959.96,1746.21 964.46,1746.21
  Bottom Layer w25: 964.46,1746.21 v1(979.02,1746.21) 1025.88,1746.21 1057.94,1778.27 ; v1(990.42,1778.27) 1057.94,1778.27 ; 1167.78,1571.52 1221.72,1571.52 1248.53,1598.33 1251.04,1598.33 ; 1251.04,1585.06 1251.04,1598.33 ; v1(1254.73,1797.76) 1235.23,1778.27 1198.91,1778.27 ; 1951.84,-38.8 cw(c1986.74,-38.8) 1962.06,-14.12 1968.84,-7.35 cw(c2024.37,-62.87) 2024.37,15.65 ; 1057.94,1778.27 1198.91,1778.27 ; 1198.91,1778.27 1251.42,1725.76 1251.42,1598.7 1251.04,1598.33
  Bottom Layer w28: 1415.84,1853.65 cw(c1468.96,1800.54) 1468.96,1875.65 1549.04,1875.65 cw(c1549.04,1827.85) 1582.84,1861.65
  Bottom Layer w30: 2024.37,15.65 2750.8,15.65 ccw(c2750.8,73.7) 2791.84,32.65 ccw(c2750.27,74.23) 2809.06,74.23 2809.06,354.65 2809.06,1735.7 ccw(c2709.06,1735.7) 2779.77,1806.42 2779.06,1807.13 ccw(c2752.51,1780.57) 2752.51,1818.13 2679.84,1818.13
  Bottom Layer w40: 1251.04,1585.06 v1(1316.19,1519.91) 1370.84,1574.56 1370.84,1620.65 ccw(c1305.66,1685.84) 1397.84,1685.84 1397.84,1810.2 cw(c1459.3,1810.2) 1415.84,1853.65 ; 1582.84,1861.65 1597.08,1847.42 ccw(c1667.79,1918.13) 1667.79,1818.13 1930.84,1818.13 2679.84,1818.13
  other v1: 2176.58,-2011.53 1934.27,2961.65 1934.27,2992.65 1934.27,3025.65
+5: J1.19 J1.20 J2.19 J2.20 TP3.1 | length 4568.9
  Top Layer w8: J2.19@1949.83,3351.56 1949.83,3244.66 1967.73,3226.76 J2.20@1967.73,3351.56 ; J1.19@2190.17,-2444.11 2191.95,-2442.33 2191.95,-2354.43 2209.86,-2336.53 J1.20@2209.86,-2444.11
  Bottom Layer w8: J2.19@1949.83,3351.56 1949.83,3255.66 1967.73,3237.76 J2.20@1967.73,3351.56 ; J1.19@2190.17,-2444.11 2191.95,-2442.33 2191.95,-2354.43 2209.86,-2336.53 J1.20@2209.86,-2444.11
  Bottom Layer w25: 1987.84,-78.35 cw(c2031.3,-78.35) 2000.57,-47.62 2002.84,-45.35 cw(c2026.98,-69.49) 2026.98,-35.35 2057.84,-34.35
  Bottom Layer w40: 1971.26,1896.47 ccw(c2002.64,1927.86) 2002.64,1883.47
  Bottom Layer w50: 2002.64,1884.47 2784.6,1884.47 cw(c2784.6,1828.66) 2824.06,1868.13 2831.1,1861.09 cw(c2760.39,1790.38) 2860.39,1790.38 2860.39,354.65 2860.39,47.08 cw(c2783.42,47.08) 2837.84,-7.35 cw(c2772.7,57.8) 2772.7,-34.33 2063.06,-34.33 2062.84,-34.55
  other v1: 2208.58,-2027.53 2783.84,1879.65 2699.84,1882.65 1966.46,2993.38
ACCELERO_INT: J1.14 J2.14 | length 8240.3
  Top Layer w8: J2.14@1849.62,3351.56 1849.62,1822.6 ccw(c1920.51,1822.6) 1870.39,1772.47 ccw(c1909.19,1811.27) 1909.19,1756.4 2690.31,1756.4 cw(c2690.31,1723.12) v1(2713.84,1746.65) ; J1.14@2091.75,-2444.11 v1@2091.75,-2011.53
  Bottom Layer w8: v1@1849.62,2977.38 J2.14@1849.62,3351.56 ; 1864.01,-36.35 1864.01,-35.7 ; J1.14@2091.75,-2444.11 2091.75,-1873.7 ; 2091.95,-1873.7 1864.09,-36.34 1864.01,-35.7 ; v1(2713.84,1746.65) 2713.84,1722.48 ccw(c2720.67,1722.48) 2715.84,1717.65 cw(c2706.19,1708) 2719.84,1708 2719.84,119.14 cw(c2699.36,119.14) 2713.84,104.65 cw(c2687.29,131.21) 2687.29,93.65 1981.26,93.65 ccw(c1981.26,-6.35) 1910.55,64.36 1885.84,39.65 ccw(c1938.55,-13.05) 1864.01,-13.05 1864.01,-35.7
  other v1: 2091.39,-2011.53 1849.26,2977.38
ADC_CH1: J1.5 J2.5 | length 8582.8
  Top Layer w8: J2.5@1672.46,3351.56 1672.46,1782.82 ccw(c1772.46,1782.82) 1701.75,1712.11 1776.1,1637.76 ccw(c1846.81,1708.47) 1846.81,1608.47 2661.99,1608.47 cw(c2661.99,1508.47) 2732.7,1579.18 2761.84,1550.04 cw(c2723.22,1511.41) 2777.84,1511.41 2777.84,214.67 cw(c2678.83,214.67) 2748.84,144.65 2735.6,131.41 cw(c2707.22,159.78) 2707.22,119.65 1747.13,119.65 ccw(c1747.13,51.37) 1708.25,107.51 ccw(c1773.65,42.11) 1681.16,42.11 1681.16,6.96 1914.39,-1873.7 v1(1914.39,-2027.53) ; J1.5@1914.58,-2444.11 v1@1914.58,-2027.53
  Bottom Layer w8: v1@1672.46,2993.65 J2.5@1672.46,3351.56 ; J1.5@1914.58,-2444.11 v1@1914.58,-2027.53
  other v1: 1672.26,2993.38
CAP1_TOUCH_OUT: J1.7 J2.7 | length 8555.3
  Top Layer w8: J2.7@1711.83,3351.56 1711.83,1792.45 ccw(c1811.83,1792.45) 1741.12,1721.74 1794.1,1668.76 ccw(c1864.81,1739.47) 1864.81,1639.47 2673.6,1639.47 cw(c2673.6,1539.47) 2744.31,1610.18 2794.84,1559.65 cw(c2763.46,1528.27) 2807.84,1528.27 2807.84,201.08 cw(c2707.84,201.08) 2778.55,130.36 2750.84,102.65 cw(c2719.46,134.04) 2719.46,89.65 1801.44,89.65 ccw(c1801.44,-5.94) 1733.84,61.65 ccw(c1761.57,33.93) 1722.36,33.93 1722.36,-7.78 1953.76,-1873.7 v1@1953.76,-2027.53 ; J1.7@1953.95,-2444.11 v1(1953.95,-2027.53)
  Bottom Layer w8: v1@1711.83,2993.65 J2.7@1711.83,3351.56 ; J1.7@1953.95,-2444.11 v1(1953.95,-2027.53)
  other v1: 1711.83,2993.38
CAP2_TOUCH_OUT: J1.8 J2.8 | length 8578.1
  Top Layer w8: J2.8@1731.51,3351.56 1731.51,1798.77 ccw(c1831.51,1798.77) 1760.8,1728.06 1804.1,1684.76 ccw(c1874.81,1755.47) 1874.81,1655.47 2680.6,1655.47 cw(c2680.6,1555.47) 2751.31,1626.18 2805.17,1572.32 cw(c2762.49,1529.65) 2822.84,1529.65 2822.84,193.08 cw(c2722.84,193.08) 2793.55,122.36 2757.84,86.65 cw(c2728.87,115.62) 2728.87,74.65 1804.11,74.65 ccw(c1804.11,12.06) 1759.84,56.32 ccw(c1800.49,15.67) 1743.01,15.67 1743.01,-13.95 ; 1743.01,-15.37 1743.01,-13.95 ; J1.8@1973.64,-2444.11 v1(1973.64,-2011.53) 1973.64,-1873.7 1743.18,-15.35 1743.01,-13.95
  Bottom Layer w8: v1(1731.51,2977.38) J2.8@1731.51,3351.56 ; J1.8@1973.64,-2444.11 v1(1973.64,-2011.53)
EN: J1.17 J2.17 | length 8213.8
  Top Layer w8: J2.17@1908.68,3351.56 1908.68,1822.08 ccw(c1935,1822.08) 1916.37,1803.49 ccw(c1923.63,1810.71) 1923.63,1800.47 2730.97,1800.47 cw(c2730.97,1773.78) 2749.84,1792.65 cw(c2691.9,1734.71) v1@2770.92,1756.4 ; J1.17@2150.8,-2444.11 v1(2150.8,-2027.53)
  Bottom Layer w8: v1@1908.68,2993.65 J2.17@1908.68,3351.56 ; 1922.84,-37.6 cw(c1995.89,-37.6) 1944.24,14.05 1955.84,25.65 cw(c2002.41,-20.92) 2002.41,44.94 2728.33,44.94 ccw(c2728.33,95.17) 2763.84,59.65 ccw(c2746.76,76.74) 2770.92,76.74 v1(2770.92,1756.65) ; 1923.1,-37.57 2150.8,-1873.7 J1.17@2150.8,-2444.11
  other v1: 1908.68,2993.38
GND: C1.1 C2.2 C3.2 C4.2 C5.1 C6.1 C7.2 C8.2 C11.1 C12.1 C13.2 C14.2 C16.1 C17.2 J1.1 J1.2 J2.1 J2.2 R2.1 R3.1 R4.1 R8.2 R10.2 R11.2 TP4.1 U1.4 U1.5 U1.10 U1.14 U1.18 U1.33 Y1.2 Y1.4 | length 13004.5
  Top Layer w8: C13.2@851.58,1586.21 855.28,1586.21 884.24,1557.25 884.24,1551.49 900.11,1535.62 1090.91,1535.62 1099.85,1544.56 U1.10@1099.85,1567.19 1099.85,1617.55 v2(1105.76,1623.45) U1.33@1139.22,1656.92 ; C2.2@908.18,1777.08 C2.2@914.71,1783.61 ; C3.2@909.41,1746.21 C3.2@914.71,1740.92 ; R10.2@914.7,1652.73 cw(c908.58,1646.6) 917.24,1646.6 v1(917.24,1630.76) 917.24,1599.08 R11.2@914.89,1596.73 ; U1.5@1049.5,1656.92 U1.33@1139.22,1656.92 ; U1.4@1049.5,1676.6 U1.33@1105.76,1676.6 ; U1.14@1178.59,1567.19 1178.59,1609.74 1192.31,1623.45 v2(1192.37,1623.45) ; U1.18@1248.63,1617.55 1198.28,1617.55 v2(1192.37,1623.45) ; 1593.72,3126.38 J2.1@1593.72,3351.56 ; 1598.15,3253.95 1611.62,3267.43 J2.2@1611.62,3351.56 ; J1.1@1835.84,-2444.11 1835.84,-2336.53 ; 1840.27,-2340.96 1853.75,-2354.43 J1.2@1853.75,-2442.33 ; U1.33@1139.22,1656.92 v2(1149.06,1666.76) v2(1192.37,1623.45)
  Top Layer w12: v1(872.49,1873.58) 908.7,1873.58 R8.2@914.73,1867.54 ; v1@882.58,1746.21 C3.2@909.41,1746.21 ; v1@882.58,1777.08 C2.2@908.18,1777.08
  Top Layer w15: 851.58,1569.13 C13.2@851.58,1586.21
  Top Layer w16: v1(1116.77,1867.54) 1098.19,1867.54 1097.29,1866.64 R3.1@1145.04,1866.64 R2.1@1192.04,1866.64 ; v1(1348.24,1711.98) 1349.03,1712.77 1374.61,1712.77 1381.38,1719.53 Y1.2@1381.38,1721.5 ; C4.2@1376.75,1550.04 1395.29,1550.04 1408.24,1562.99 v1(1408.24,1574.98) ; C8.2@1376.75,1596.04 1380.06,1599.35 1398.87,1599.35 1408.24,1589.98 v1(1408.24,1574.98) ; C5.1@1415.64,1835.21 v1@1446.78,1804.08 ; Y1.4@1422.75,1774.65 1422.75,1776.62 v1@1450.2,1804.08 ; TP4.1@1467.84,1576.65 1466.17,1574.98 v1(1408.24,1574.98) ; C1.1@1527.53,1715.47 1528.33,1716.27 v1(1555.75,1716.27)
  Top Layer w18: C7.2@1252.04,1866.64 1252.1,1866.58 1299.2,1866.58 C6.1@1299.26,1866.52 1300.48,1865.3 1301.94,1866.76 v1(1326.84,1866.76)
  Top Layer w20: C13.2@851.58,1586.21 C11.1@851.58,1633.21 ; v1(1317.34,1250.65) 1317.34,1223.93 C17.2@1317.06,1223.65 1317.16,1223.56 1365.65,1223.56 C14.2@1365.75,1223.46 ; C12.1@1584.06,1223.46 C16.1@1633.09,1223.47 v1(1633.09,1250.19)
  Top Layer w25: 1598.15,2666.38 1598.15,3253.95 ; 1840.27,-2340.96 1840.27,-1876.53
  Top Layer w30: 1598.15,2666.38 v1(1598.15,1900.65) 1598.15,1751.13 ccw(c1698.15,1751.13) 1627.44,1680.42 1736.1,1571.76 ccw(c1806.81,1642.47) 1806.81,1542.47 2658.41,1542.47 cw(c2658.41,1478.22) 2703.84,1523.65 cw(c2665.22,1485.03) 2719.84,1485.03 2719.84,218.04 cw(c2675.46,218.04) 2706.9,186.71 cw(c2682.7,210.8) 2682.7,176.65 1686.3,176.65 ccw(c1686.3,115.2) 1642.84,158.65 1634.13,149.94 ccw(c1704.84,79.23) 1604.84,79.23 1604.84,55.65
  Top Layer w31.5: 851.58,1569.13 851.58,1450.68 ccw(c897.62,1450.68) 865.06,1418.13 ccw(c913.35,1466.41) 913.35,1398.13 1359.64,1398.13 cw(c1359.64,1298.13) 1430.35,1368.84 1446.77,1352.42 cw(c1376.06,1281.7) 1476.06,1281.7 v1(1476.06,1261.13)
  Bottom Layer w8: 1593.72,3126.38 J2.1@1593.72,3351.56 ; 1597.26,3253.06 1611.62,3267.43 J2.2@1611.62,3351.56 ; J1.1@1835.84,-2444.11 1835.84,-2336.53 ; 1839.39,-2340.07 1853.75,-2354.43 J1.2@1853.75,-2442.33
  Bottom Layer w12: 787.23,1873.58 v1(872.49,1873.58) 1033.92,1873.58 1039.95,1867.54 v1(1116.77,1867.54) ; v1(876.58,1746.21) v1(876.58,1777.08)
  Bottom Layer w15: 590.84,1588.54 640.74,1538.65 695.84,1538.65 725.84,1568.65 725.84,1639.65 753.84,1667.65 842.84,1667.65 879.73,1630.76 v1(917.24,1630.76)
  Bottom Layer w16: v1(1116.77,1867.54) 1331.87,1867.54 1348.24,1851.16 v1(1348.24,1711.98) ; v1(1408.24,1574.98) 1470.17,1574.98 1555.75,1660.56 v1(1555.75,1716.27) ; v1(1452.06,1804.08) 1539.87,1716.27 v1(1555.75,1716.27) ; v1(1597.08,1742.65) 1570.7,1716.27 v1(1555.75,1716.27)
  Bottom Layer w20: 590.84,1588.54 590.84,1667.65 669.41,1746.21 751.96,1746.21 ; v1(1317.34,1250.65) 1320.57,1247.42 ccw(c1391.28,1318.13) 1391.28,1218.13 1476.06,1218.13 ; v1@1331.87,1867.54 1342.69,1878.36 cw(c1413.4,1807.65) 1413.4,1907.65 1581.25,1907.65 cw(c1581.25,1883.75) v1(1598.15,1900.65) ; v1(1476.06,1261.13) 1476.06,1218.13 ; v1(1633.09,1250.19) 1630.31,1247.42 cw(c1559.6,1318.13) 1559.6,1218.13 1476.06,1218.13
  Bottom Layer w25: 787.23,1873.58 768.76,1873.58 717.84,1822.65 717.84,1780.34 751.96,1746.21 v1(876.58,1746.21) 910.81,1711.98 1103.85,1711.98 v2(1105.76,1710.07) ; v1@1597.26,2977.38 1597.26,3253.06 ; 1839.39,-2340.07 v1@1839.39,-2011.53
  other v1: 1838.39,-2011.53 1596.26,2977.38
  other v2: 1149.06,1623.45 1105.76,1666.76 1192.37,1666.76 1149.06,1710.07 1192.37,1710.07
"LED Str CLK": J1.10 J2.10 | length 8551.2
  Top Layer w8: J2.10@1770.88,3351.56 1770.88,1807.4 ccw(c1870.88,1807.4) 1800.17,1736.69 1821.39,1715.47 ccw(c1888.98,1783.07) 1888.98,1687.47 2692.6,1687.47 cw(c2692.6,1587.47) 2763.31,1658.18 2824.55,1596.94 cw(c2753.84,1526.23) 2853.84,1526.23 2853.84,179.08 cw(c2753.84,179.08) 2824.55,108.36 2784.67,68.48 cw(c2727.84,125.31) 2727.84,44.94 1835.34,44.94 ccw(c1835.34,-3.85) 1800.84,30.65 ccw(c1840.97,-9.47) 1784.22,-9.47 1784.22,-28.24 ; 1784.16,-28.31 2013.01,-1873.7 v1(2013.01,-2011.53) J1.10@2013.01,-2444.11
  Bottom Layer w8: v1(1770.88,2977.38) J2.10@1770.88,3351.56 ; J1.10@2013.01,-2444.11 v1(2013.01,-2011.53)